# Altium PCB Kar_PCB.PcbDoc
Units mil, origin at the board's own origin, x right, y up, seen from the top; angles counter-clockwise.
Board outline 5655 x 3440 mil, 2 copper layers (Top Layer, Bottom Layer), stack 30.709 mil thick; 64 components, 44 nets, 297 pads, 317 vias.
Unrouted connection lines stored in the file: 2.
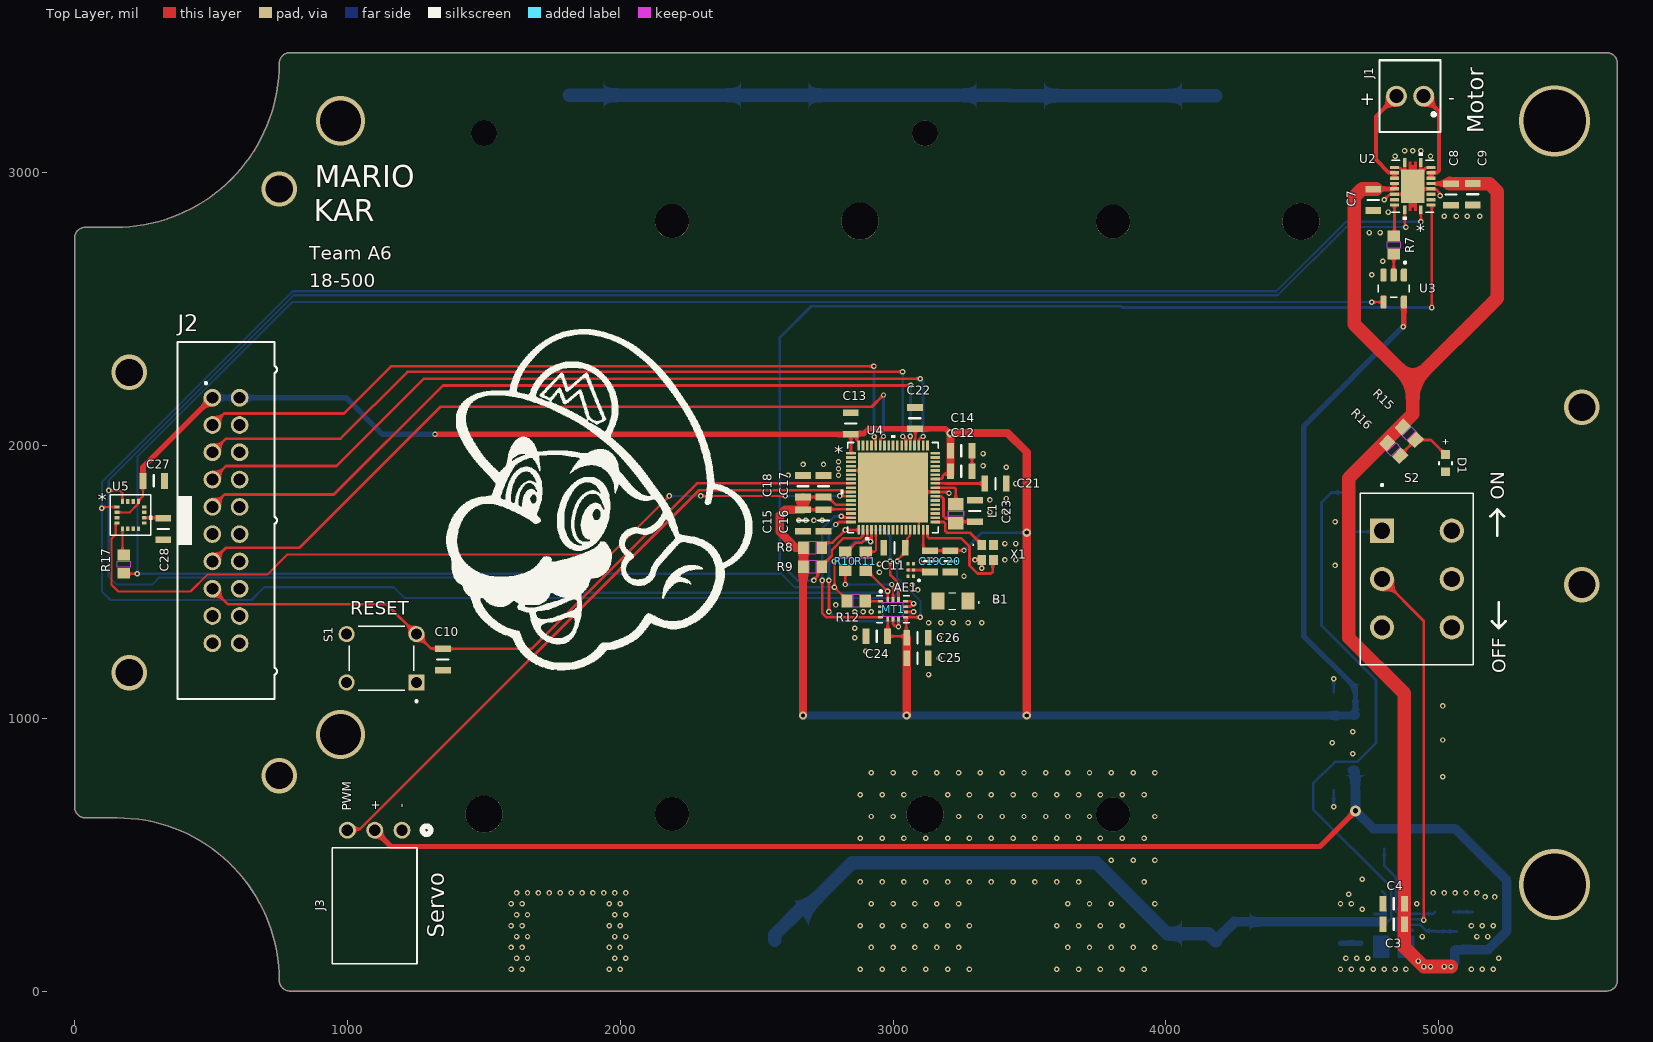
[diagram p0: Top Layer view]
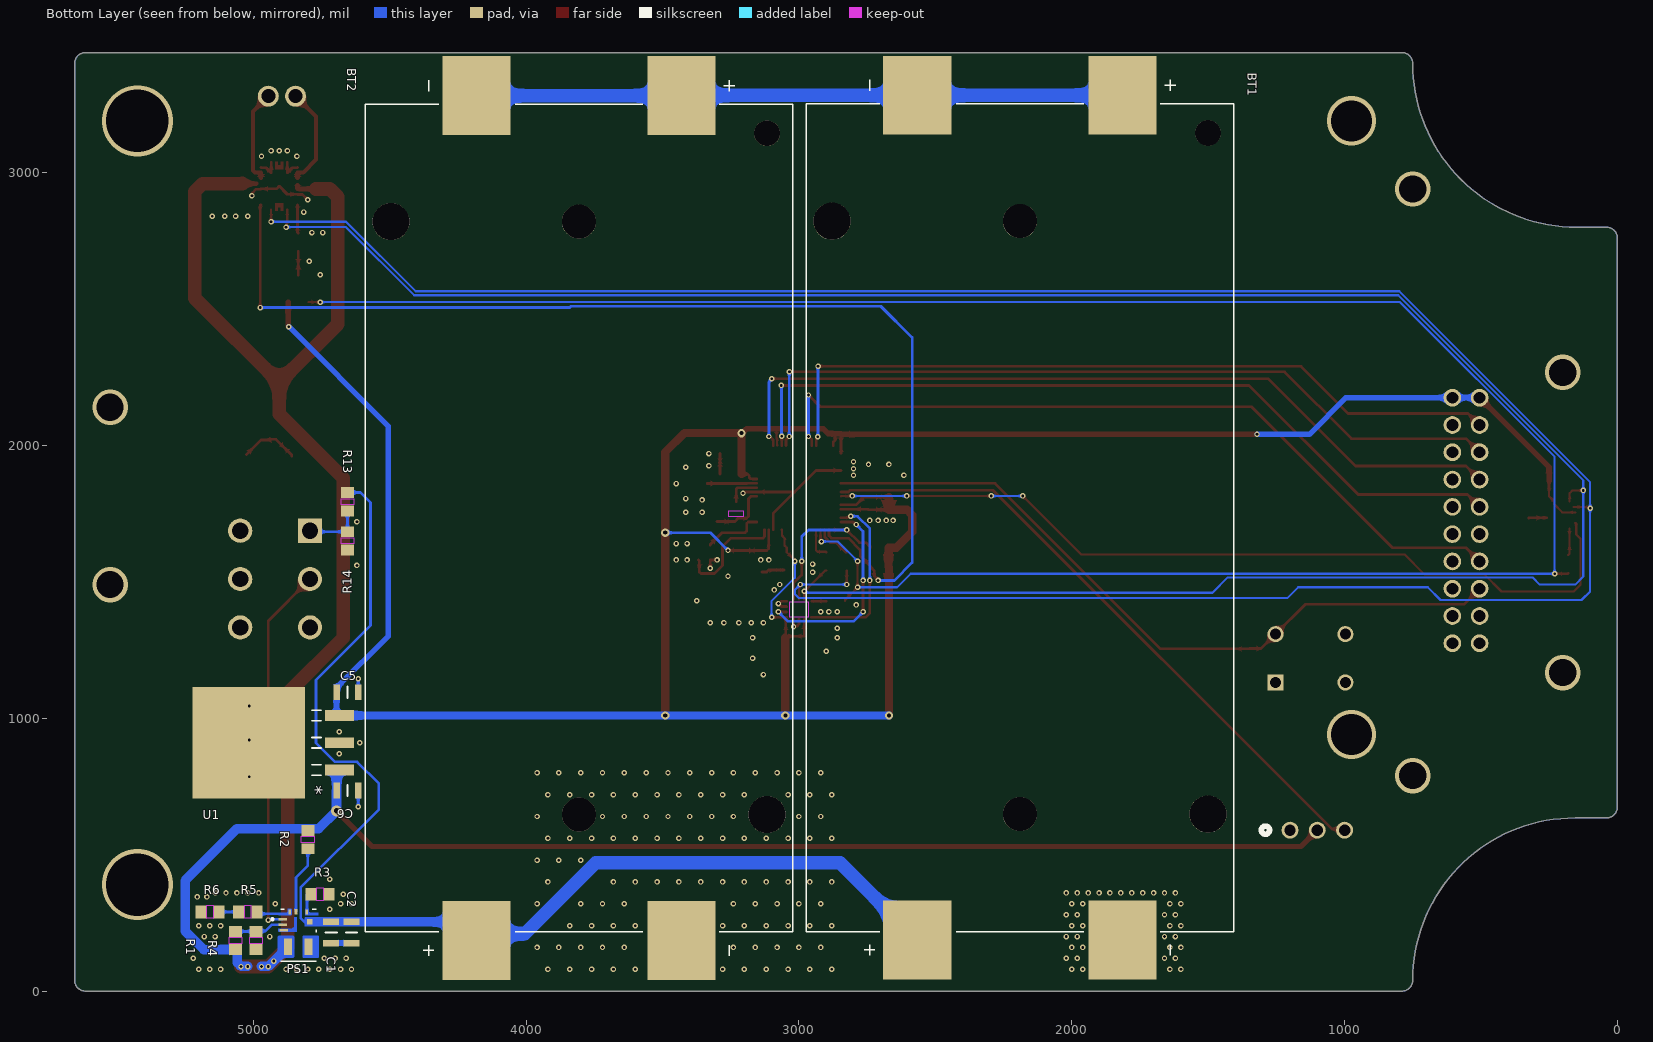
[diagram p1: Bottom Layer view, seen from below]
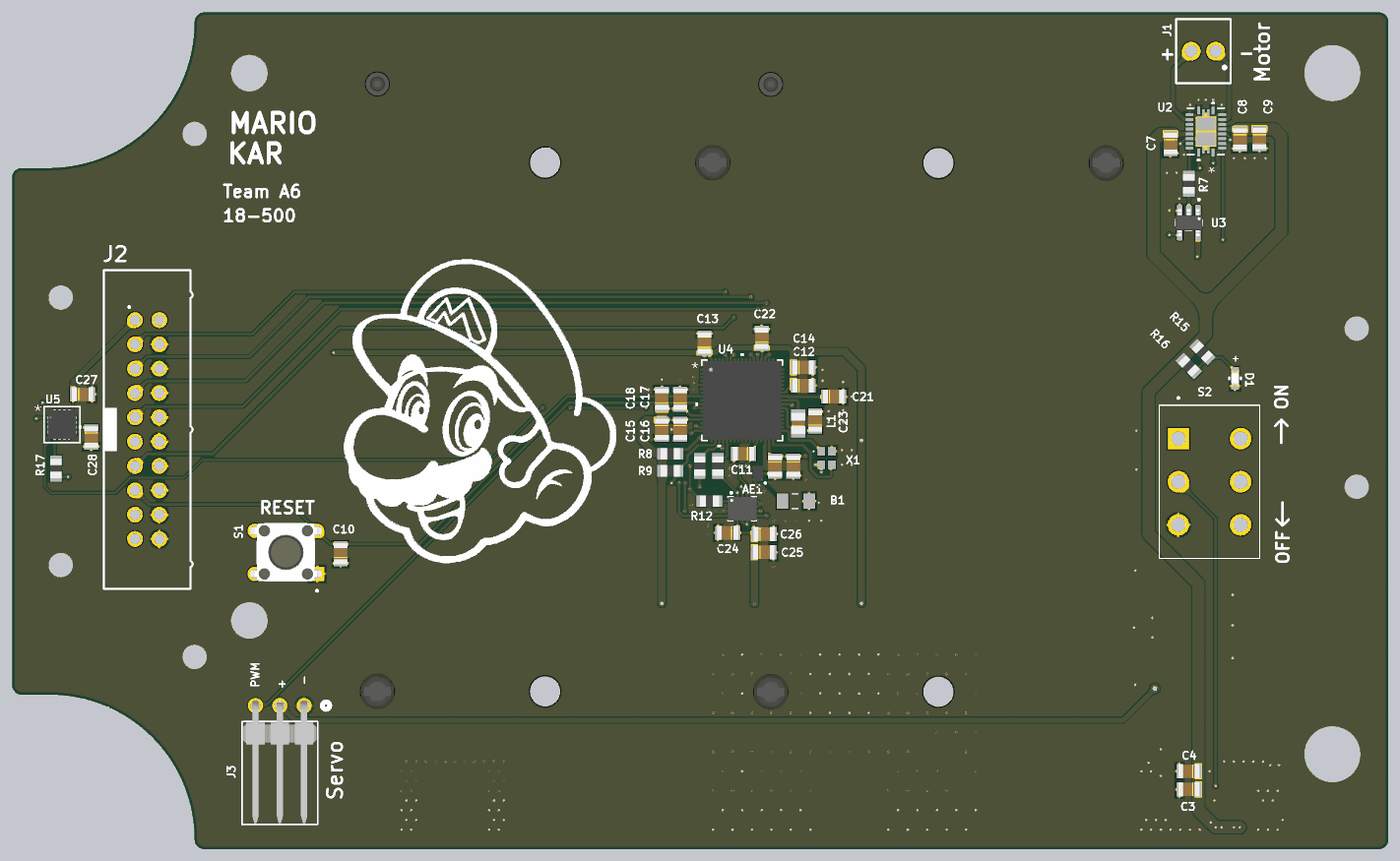
[diagram p2: 3D render of the assembled board from above, using the file's embedded part models]
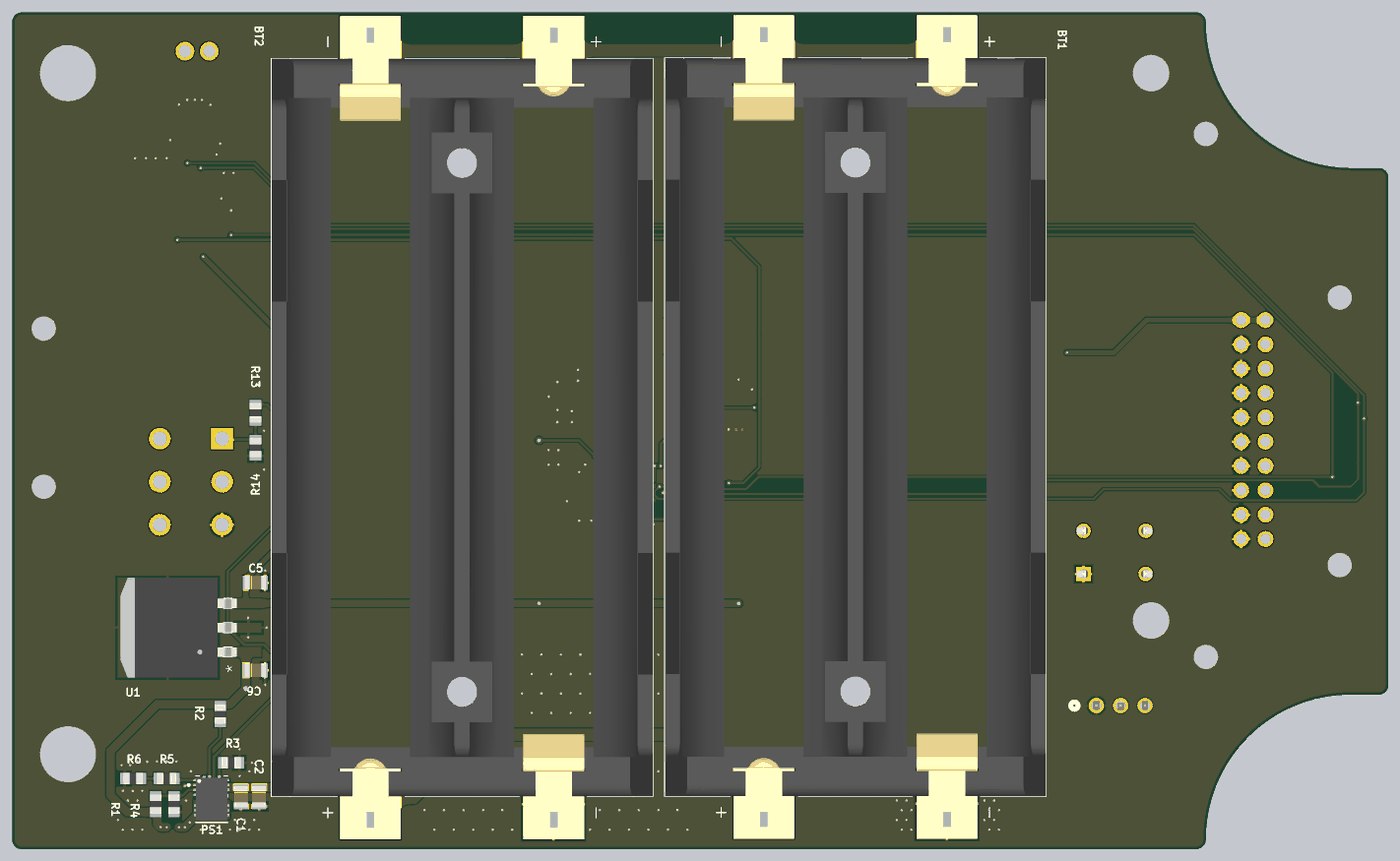
[diagram p3: 3D render of the assembled board from below, using the file's embedded part models]

## Layer stack, top to bottom
Top Solder: solder mask 0.3937, Solder Resist, Dk 3.5
Top Layer: signal copper 2.7559
Dielectric 1: dielectric 25.1969, FR-4, Dk 4.8
Bottom Layer: signal copper 2.7559
Bottom Solder: solder mask 0.3937, Solder Resist, Dk 3.5

## Board outline
40,635 cw(c40,675) 0,675 0,2760 cw(c40,2760) 40,2800 150,2800 ccw(c150,3400) 750,3400 cw(c790,3400) 790,3440 5615,3440 cw(c5615,3400) 5655,3400 5655,40 cw(c5615,40) 5615,0 790,0 cw(c790,40) 750,40 ccw(c155,40) 155,635

## Design rules (kind name [scope] priority, off if disabled: settings)
BoardOutlineClearance [All] p1: gap=10 ignorepadtopadclearanceinfootprint=FALSE
Clearance Clearance_KOL [IsKeepOut] p1: gap=2 ignorepadtopadclearanceinfootprint=FALSE
Clearance Clearance_KOL_1 [OnLayer('Keep-Out Layer')] p2: gap=2 ignorepadtopadclearanceinfootprint=FALSE
Clearance [All] p3: gap=5 ignorepadtopadclearanceinfootprint=FALSE
ComponentClearance ComponentClearance_ESP32 [All vs InComponent('U1')] p1: gap=0 collisioncheckmode=3 verticalgap=0 showdistances=FALSE
ComponentClearance [All] p2: gap=10 collisioncheckmode=3 verticalgap=10 showdistances=FALSE
HoleSize [All] p1: absolutevalues=TRUE maxlimit=236.22 minlimit=0.98 maxpercent=80.000 minpercent=20.000
MinimumSolderMaskSliver [All] p1: minsoldermaskwidth=5
PolygonConnect PolygonConnect_Stitch [isVia and InNet('GND')] p1: connectstyle=Direct reliefconductorwidth=10 reliefentries=4 polygonreliefangle="90 Angle" airgapwidth=10
PolygonConnect [All] p2: connectstyle=Relief reliefconductorwidth=10 reliefentries=4 polygonreliefangle="90 Angle" airgapwidth=10
RoutingVias [All] p1: holewidth=10 width=20 viastyle="Through Hole" minholewidth=10 minwidth=20 maxholewidth=230 maxwidth=260
SilkToSilkClearance [All] p1: silktosilkclearance=7
SolderMaskExpansion [All] p1: expansion=4 istentingtop=FALSE
SupplyNets "Schematic Supply Nets_1" [InNet('5V')] p1: voltage=0.000
Width Width_S50 [InNetClass('S50')] p1: maxlimit=42.51 minlimit=42.51 preferedwidth=42.51 impedanceprofiledriven=TRUE impedanceprofileid={861DD816-028D-45EC-A50D-6FCF3679BF68} impedanceprofilevalue=50.000000 minimp=50.000000 maximp=50.000000 favimp=50.000000
Width Width_S62 [InNetClass('S62')] p2: maxlimit=27.95 minlimit=27.95 preferedwidth=27.95 impedanceprofiledriven=TRUE impedanceprofileid={597D7582-E736-41B3-9602-78B84F21D497} impedanceprofilevalue=62.000000 minimp=50.000000 maximp=50.000000 favimp=50.000000
Width [All] p3: maxlimit=50 minlimit=8 preferedwidth=10
26 further rules are at their usual default settings.

## Classes and differential pairs
component class U_Magnetometer: C27 C28 R17 U5
net class S62: NetAE1_A3
net class S50: NetAE1_A1
component class U_STM32: AE1 B1 C10 C11 C12 C13 C14 C15 C16 C17 C18 C19 C20 C21 C22 C23 J2 J3 L1 R8 R9 R10 R11 S1 U4 X1
component class U_Power: C1 C2 C3 C4 C5 C6 D1 PS1 R1 R2 R3 R4 R5 R6 R13 R14 R15 R16 S2 U1
component class U_Motor: C7 C8 C9 R7 U3
component class U_Kar_IMU: C24 C25 C26 MT1 R12
component class Kar_PCB: BT1 BT2 J1

## Components (designator, comment, footprint, x,y, rotation, side; value= is the part's Value field where it differs from the comment)
AE1 "MLPF-WB55-01E3" MLPF-WB55-01E3_STM 3064.84,1543.43 r180 top
B1 "W3078" W3078 3220.12,1430.32 r180 top
BT1 "1048P" BAT_1048P 2190,1735.32 r90 bottom
BT2 "1048P" BAT_1048P 3806.18,1733.74 r90 bottom
C1 "C2012X5R1H106K125AC" CAPC2012X145N 4715,215.31 r90 bottom value=10u
C2 "KAM21BR71H104JM" CAPC2012X145N 4640,215.31 r90 bottom value=0.1u
C3 "C2012X5R1V226M125AC" CAPC2012X145N 4835,245.31 r0 top value=22u
C4 "C2012X5R1V226M125AC" CAPC2012X145N 4835,320.31 r0 top value=22u
C5 "C2012X5R1A336M125AC" CAPC2012X145N 4655,1095.32 r0 bottom value=33u
C6 "GCM21BR71H474KA55K" CAPC2012X145N 4655,735.32 r0 bottom value=0.47u
C7 "KAM21BR71H104JM" CAPC2012X145N 4760,2900.32 r90 top value=0.1u
C8 "KAM21BR71H104JM" CAPC2012X145N 5045,2920.32 r90 top value=0.1u
C9 "C2012X5R1H106K125AC" CAPC2012X145N 5125,2920.94 r90 top value=10u
C10 "KAM21BR71H104JM" CAPC2012X145N 1350,1215 r270 top value=0.1u
C11 "KAM21BR71H104JM" CAPC2012X145N 3005,1625.32 r0 top value=0.1u
C12 "KAM21BR71H104JM" CAPC2012X145N 3250,1905.32 r180 top value=0.1u
C13 "KAM21BR71H104JM" CAPC2012X145N 2845,2080.32 r270 top value=0.1u
C14 "C2012X5R1H475M125AB" CAPC2012X145N 3250,1980.32 r180 top value=4.7u
C15 "KAM21BR71H103KT" CAPC2012X145N 2670,1725.32 r90 top value=0.01u
C16 "KGM21AR51H105KU" CAPC2012X145N 2745,1725.32 r90 top value=1u
C17 "KAM21BR71H104JM" CAPC2012X145N 2745,1850.32 r270 top value=0.1u
C18 "KGM21AR51H105KU" CAPC2012X145N 2670,1850.32 r270 top value=1u
C19 "KAM21BR71H104JM" CAPC2012X145N 3135,1575.32 r90 top value=0.1u
C20 "KGM21AR51H105KU" CAPC2012X145N 3210,1575.32 r90 top value=1u
C21 "C2012X5R1H475M125AB" CAPC2012X145N 3375,1860.32 r180 top value=4.7u
C22 "KAM21BR71H104JM" CAPC2012X145N 3080,2100 r270 top value=0.1u
C23 "C2012X5R1H475M125AB" CAPC2012X145N 3300,1760.32 r270 top value=4.7u
C24 "KAM21BR71H104JM" CAPC2012X145N 2940,1300.32 r0 top value=0.1u
C25 "KAM21BR71H104JM" CAPC2012X145N 3089.37,1220.32 r180 top value=0.1u
C26 "C2012X7R1H225K125AE" CAPC2012X145N 3090,1295.32 r180 top value=2.2u
C27 "KGM21AR51H105KU" CAPC2012X145N 290,1870 r180 top value=1u
C28 "C2012X5R1H106K125AC" CAPC2012X145N 325,1694.33 r90 top value=10u
D1 "WL-SMCW_0603" WL-SMCW_0603 5025,1935.32 r90 top
J1 "691210910002" 691210910002 4895,3280.32 r180 top
J2 "6120XX21621_61202021621" 61202021621 555,1725 r270 top
J3 "22289033" CONN03_22289033_MOL 1200,590 r0 top
L1 "LQM21FN100M80L" IND_LQM21FN100M80L_MUR 3230,1750 r90 top value=10u
MT1 "ICM-42670-P" XDCR_ICM-42670-P 3000,1399.39 r0 top
PS1 "TPSM843321RCJR" MODULE_TPSM843321RCJR 4835,205.31 r180 bottom
R1 "RC0805FR-0773K2L" RC0805N_YAG 5065,185.31 r90 bottom value=73.2k
R2 "RC0805FR-0710KL" RC0805N_YAG 4800,555.32 r270 bottom value=10k
R3 "RC0805FR-0718KL" RC0805N_YAG 4755,355.31 r180 bottom value=18k
R4 "RC0805FR-0710KL" RC0805N_YAG 4990,185.31 r270 bottom value=10k
R5 "RC0805FR-0718KL" RC0805N_YAG 5020,290.31 r0 bottom value=18k
R6 "RC0805FR-0722KL" RC0805N_YAG 5158.5,290.31 r0 bottom value=22k
R7 "RC0805JR-07100RL" RC0805N_YAG 4835,2735 r90 top value=100
R8 "RC0805JR-074K7L" RC0805N_YAG 2705,1625.32 r0 top value=4.7k
R9 "RC0805JR-074K7L" RC0805N_YAG 2705,1555.32 r0 top value=4.7k
R10 "RC0805JR-07100RL" RC0805N_YAG 2825,1575.32 r270 top value=100
R11 "RC0805JR-07100RL" RC0805N_YAG 2900,1575.32 r270 top value=100
R12 "RC0805JR-07100RL" RC0805N_YAG 2865,1430.32 r0 top value=100
R13 "RC0805FR-0710KL" RC0805N_YAG 4655,1793.82 r270 bottom value=10k
R14 "RC0805FR-0710KL" RC0805N_YAG 4655,1650.32 r270 bottom value=10k
R15 "RC0805JR-07100RL" RC0805N_YAG 4891.31,2044 r315 top value=100
R16 "RC0805JR-07100RL" RC0805N_YAG 4835,1985.32 r315 top value=100
R17 "RC0805JR-07100RL" RC0805N_YAG 180,1565 r90 top value=100
S1 "TS02-66-70-BK-260-LCR-D" SW_TS02-66-70-BK-260-LCR-D 1125,1220 r180 top
S2 "SLW-1678105-6A-N-D" SW_SLW-1678105-6A-N-D 4920,1510.32 r270 top
U1 "LM3940ISX-3.3/NOPB" TS3B 5010,910.32 r90 bottom
U2 "DRV8242SQRHLRQ1" VQFN20_RHL_TEX 4905,2950.32 r180 top
U3 "SN74LV1T34DBVR" SOT95P280X145-5N 4835,2575.32 r270 top
U4 "STM32WB55RGV6TR" VFQFN68-8x8mm 3000,1845.32 r0 top
U5 "MMC5983MA" MMC5983MA_MEM 205,1745 r0 top
X1 "CX2016DB32000D0WZRC1" CX2016DB32000D0WZRC1 3346.65,1607.76 r270 top

## Footprints (in the part's own frame and the unit in brackets; to place one, negate y for a bottom-side part, rotate by r counter-clockwise, add the part's x,y. Pads: shape width x height; smd on the part's side, far side on the other; paste and mask are expansions set on the pad)
61202021621 [mm]
  round 1.65 hole 1.1: 1(-11.43,-1.27) 2(-11.43,1.27) 3(-8.89,-1.27) 4(-8.89,1.27) 5(-6.35,-1.27) 6(-6.35,1.27) 7(-3.81,-1.27) 8(-3.81,1.27) 9(-1.27,-1.27) 10(-1.27,1.27) 11(1.27,-1.27) 12(1.27,1.27) 13(3.81,-1.27) 14(3.81,1.27) 15(6.35,-1.27) 16(6.35,1.27) 17(8.89,-1.27) 18(8.89,1.27) 19(11.43,-1.27) 20(11.43,1.27)
  silkscreen extent -16.63,-4.52 16.63,4.74
691210910002 [mm]
  round 1.95 hole 1.3: 1(-1.27,0) 2(1.27,0)
  silkscreen extent -2.84,-3.35 2.84,3.35
BAT_1048P [mm]
  rect 7.34x6.35 smd: N1(39.33,9.555) N2(-39.33,-9.555) P1(-39.33,9.555) P2(39.33,-9.555)
  round 3.45 hole 3.45 unplated: ""(-27.6,-17.505) ""(27.6,17.505)
  round 3.17 hole 3.17 unplated: ""(-27.6,0) ""(27.6,0)
  round 2.39 hole 2.39 unplated: ""(35.82,-17.505)
  silkscreen extent -40.75,-19.89 40.75,19.89, body extent -43,-19.89 43,19.89, height 15.05
CAPC2012X145N [mm]
  rect 0.62x1.47 smd: 1(-1,0) 2(1,0)
  silkscreen extent 0,-0.53 0,0.53, body extent -1.1,-0.72 1.1,0.72, height 1.5
CONN03_22289033_MOL [mil]
  round 62 / inner round 60 / far side round 62 hole 42 paste-99999 mask+0: 1(0,0) 2(-100,0) 3(-200,0)
  silkscreen extent -255,-489 105,15, body extent -250,-484 50,20, height 98
CX2016DB32000D0WZRC1 [mm]
  rect 0.9x0.8 smd mask+0.076: 1(-0.7,-0.55) 2(0.7,-0.55) 3(0.7,0.55) 4(-0.7,0.55)
  silkscreen extent -0.75,-1.4 -0.65,-1.3
IND_LQM21FN100M80L_MUR [mil]
  rect 46x57 smd paste+0 mask+0: 1(-34.5,0) 2(34.5,0)
  Top Layer keep-out region: -9.5,-26.5 -9.5,26.5 9.5,26.5 9.5,-26.5
  Keep-Out Layer region: -9.5,-28.5 -9.5,28.5 9.5,28.5 9.5,-28.5
  body extent -44,-29 44,29, height 57
MLPF-WB55-01E3_STM [mm]
  rect 0.3x0.3 smd paste-0.05 mask-0.051: A1(-0.25,0.587) A2(-0.25,0) A3(-0.25,-0.587) B1(0.25,0.587) B2(0.25,0) B3(0.25,-0.587)
  silkscreen extent -0.87,0.87 -0.66,1.07, body extent -0.5,-0.8 0.5,0.8, height 0.46
MMC5983MA_MEM [mil]
  rect 18x12 smd paste+0 mask+0: 1(-50.2,29.53) 2(-50.2,9.84) 3(-50.2,-9.84) 4(-50.2,-29.53) 9(50.2,-29.53) 10(50.2,-9.84) 11(50.2,9.84) 12(50.2,29.53)
  rect 12x18 smd paste+0 mask+0: 5(-29.53,-50.2) 6(-9.84,-50.2) 7(9.84,-50.2) 8(29.53,-50.2) 13(29.53,50.2) 14(9.84,50.2) 15(-9.84,50.2) 16(-29.53,50.2)
  silkscreen extent -74,-74 79,74, body extent -61,-61 61,61, height 39
MODULE_TPSM843321RCJR [mm]
  rrect40% 0.8x0.25 smd mask+0: 1(-1.45,1.475) 2(-1.45,0.975)
  rect 0.8x0.25 smd mask+0: 3(-1.35,0.463)
  rect 0.75x1.5 smd paste-2 mask+0: 4(-0.95,-1.088) 5(0.95,-1.088)
  rect 0.5x0.5 smd paste-1 mask+0: 6(1.05,1.225)
  rect 0.25x0.5 smd paste-1 mask+0: 7(0.8,2.15) 9(-0.8,2.15)
  rrect33% 0.3x0.55 smd mask+0: 8(-0.225,2.175)
  Top Layer region: 199 vertices and 0 holes, not listed, extent -1.85,0.326 -0.125,1.65
  Top Layer region: 176 vertices and 0 holes, not listed, extent -1.85,1.85 -0.625,2.45
  Top Layer region: -0.49,-0.076 -0.484,-0.076 -0.479,-0.077 -0.474,-0.078 -0.469,-0.08 -0.464,-0.082 -0.459,-0.084 -0.455,-0.086 -0.45,-0.088 -0.446,-0.091 -0.441,-0.094 -0.437,-0.097 -0.433,-0.101 -0.429,-0.104 -0.426,-0.108 -0.422,-0.112 -0.419,-0.116 -0.416,-0.121 -0.413,-0.125 -0.411,-0.13 -0.409,-0.134 -0.407,-0.139 -0.405,-0.144 -0.403,-0.149 -0.402,-0.154 -0.401,-0.159 -0.401,-0.165 -0.4,-0.17 -0.4,-0.175 -0.4,-2 -0.4,-2.005 -0.401,-2.01 -0.401,-2.016 -0.402,-2.021 -0.403,-2.026 -0.405,-2.031 -0.407,-2.036 -0.409,-2.041 -0.411,-2.045 -0.413,-2.05 -0.416,-2.054 -0.419,-2.059 -0.422,-2.063 -0.426,-2.067 -0.429,-2.071 -0.433,-2.074 -0.437,-2.078 -0.441,-2.081 -0.446,-2.084 -0.45,-2.087 -0.455,-2.089 -0.459,-2.091 -0.464,-2.093 -0.469,-2.095 -0.474,-2.097 -0.479,-2.098 -0.484,-2.099 -0.49,-2.099 -0.495,-2.1 -1.805,-2.1 -1.81,-2.099 -1.816,-2.099 -1.821,-2.098 -1.826,-2.097 -1.831,-2.095 -1.836,-2.093 -1.841,-2.091 -1.845,-2.089 -1.85,-2.087 -1.854,-2.084 -1.859,-2.081 -1.863,-2.078 -1.867,-2.074 -1.871,-2.071 -1.874,-2.067 -1.878,-2.063 -1.881,-2.059 -1.884,-2.054 -1.887,-2.05 -1.889,-2.045 -1.891,-2.041 -1.893,-2.036 -1.895,-2.031 -1.897,-2.026 -1.898,-2.021 -1.899,-2.016 -1.899,-2.01 -1.9,-2.005 -1.9,-2 -1.9,-0.175 -1.9,-0.17 -1.899,-0.165 -1.899,-0.159 -1.898,-0.154 -1.897,-0.149 -1.895,-0.144 -1.893,-0.139 -1.891,-0.134 -1.889,-0.13 -1.887,-0.125 -1.884,-0.121 -1.881,-0.116 -1.878,-0.112 -1.874,-0.108 -1.871,-0.104 -1.867,-0.101 -1.863,-0.097 -1.859,-0.094 -1.854,-0.091 -1.85,-0.088 -1.845,-0.086 -1.841,-0.084 -1.836,-0.082 -1.831,-0.08 -1.826,-0.078 -1.821,-0.077 -1.816,-0.076 -1.81,-0.076 -1.805,-0.075 -0.495,-0.075
  Top Layer region: 176 vertices and 0 holes, not listed, extent 0.625,1.85 1.85,2.45
  Top Layer region: 1.81,1.649 1.816,1.649 1.821,1.648 1.826,1.647 1.831,1.645 1.836,1.643 1.841,1.641 1.845,1.639 1.85,1.637 1.854,1.634 1.859,1.631 1.863,1.628 1.867,1.624 1.871,1.621 1.874,1.617 1.878,1.613 1.881,1.609 1.884,1.604 1.887,1.6 1.889,1.595 1.891,1.591 1.893,1.586 1.895,1.581 1.897,1.576 1.898,1.571 1.899,1.566 1.899,1.56 1.9,1.555 1.9,1.55 1.9,0.9 1.9,0.895 1.899,0.89 1.899,0.884 1.898,0.879 1.897,0.874 1.895,0.869 1.893,0.864 1.891,0.859 1.889,0.855 1.887,0.85 1.884,0.846 1.881,0.841 1.878,0.837 1.874,0.833 1.871,0.829 1.867,0.826 1.863,0.822 1.859,0.819 1.854,0.816 1.85,0.813 1.845,0.811 1.841,0.809 1.836,0.807 1.831,0.805 1.826,0.803 1.821,0.802 1.816,0.801 1.81,0.801 1.805,0.8 0.695,0.8 0.69,0.801 0.684,0.801 0.679,0.802 0.674,0.803 0.669,0.805 0.664,0.807 0.659,0.809 0.655,0.811 0.65,0.813 0.646,0.816 0.641,0.819 0.637,0.822 0.633,0.826 0.629,0.829 0.626,0.833 0.622,0.837 0.619,0.841 0.616,0.846 0.613,0.85 0.611,0.855 0.609,0.859 0.607,0.864 0.605,0.869 0.603,0.874 0.602,0.879 0.601,0.884 0.601,0.89 0.6,0.895 0.6,0.9 0.6,1.55 0.6,1.555 0.601,1.56 0.601,1.566 0.602,1.571 0.603,1.576 0.605,1.581 0.607,1.586 0.609,1.591 0.611,1.595 0.613,1.6 0.616,1.604 0.619,1.609 0.622,1.613 0.626,1.617 0.629,1.621 0.633,1.624 0.637,1.628 0.641,1.631 0.646,1.634 0.65,1.637 0.655,1.639 0.659,1.641 0.664,1.643 0.669,1.645 0.674,1.647 0.679,1.648 0.684,1.649 0.69,1.649 0.695,1.65 1.805,1.65
  Top Layer region: 1.81,-0.076 1.816,-0.076 1.821,-0.077 1.826,-0.078 1.831,-0.08 1.836,-0.082 1.841,-0.084 1.845,-0.086 1.85,-0.088 1.854,-0.091 1.859,-0.094 1.863,-0.097 1.867,-0.101 1.871,-0.104 1.874,-0.108 1.878,-0.112 1.881,-0.116 1.884,-0.121 1.887,-0.125 1.889,-0.13 1.891,-0.134 1.893,-0.139 1.895,-0.144 1.897,-0.149 1.898,-0.154 1.899,-0.159 1.899,-0.165 1.9,-0.17 1.9,-0.175 1.9,-2 1.9,-2.005 1.899,-2.01 1.899,-2.016 1.898,-2.021 1.897,-2.026 1.895,-2.031 1.893,-2.036 1.891,-2.041 1.889,-2.045 1.887,-2.05 1.884,-2.054 1.881,-2.059 1.878,-2.063 1.874,-2.067 1.871,-2.071 1.867,-2.074 1.863,-2.078 1.859,-2.081 1.854,-2.084 1.85,-2.087 1.845,-2.089 1.841,-2.091 1.836,-2.093 1.831,-2.095 1.826,-2.097 1.821,-2.098 1.816,-2.099 1.81,-2.099 1.805,-2.1 0.495,-2.1 0.49,-2.099 0.484,-2.099 0.479,-2.098 0.474,-2.097 0.469,-2.095 0.464,-2.093 0.459,-2.091 0.455,-2.089 0.45,-2.087 0.446,-2.084 0.441,-2.081 0.437,-2.078 0.433,-2.074 0.429,-2.071 0.426,-2.067 0.422,-2.063 0.419,-2.059 0.416,-2.054 0.413,-2.05 0.411,-2.045 0.409,-2.041 0.407,-2.036 0.405,-2.031 0.403,-2.026 0.402,-2.021 0.401,-2.016 0.401,-2.01 0.4,-2.005 0.4,-2 0.4,-0.175 0.4,-0.17 0.401,-0.165 0.401,-0.159 0.402,-0.154 0.403,-0.149 0.405,-0.144 0.407,-0.139 0.409,-0.134 0.411,-0.13 0.413,-0.125 0.416,-0.121 0.419,-0.116 0.422,-0.112 0.426,-0.108 0.429,-0.104 0.433,-0.101 0.437,-0.097 0.441,-0.094 0.446,-0.091 0.45,-0.088 0.455,-0.086 0.459,-0.084 0.464,-0.082 0.469,-0.08 0.474,-0.078 0.479,-0.077 0.484,-0.076 0.49,-0.076 0.495,-0.075 1.805,-0.075
  silkscreen extent -2.5,-2.42 1.65,2.42, body extent -1.65,-2.25 1.65,2.25, height 2.05
RC0805N_YAG [mil]
  rect 40x47 smd paste+0 mask+0: 1(-33.5,0) 2(33.5,0)
  Top Layer keep-out region: -11.5,-23.5 -11.5,23.5 11.5,23.5 11.5,-23.5
  body extent -39,-24 39,24, height 28
SOT95P280X145-5N [mm]
  rrect50% 1.21x0.59 smd: 1(-1.255,0.95) 2(-1.255,0) 3(-1.255,-0.95) 4(1.255,-0.95) 5(1.255,0.95)
  silkscreen extent -2.51,-1.45 0.8,1.45, body extent -1.4,-1.45 1.4,1.45, height 1.45
SW_SLW-1678105-6A-N-D [mm]
  rect 2.25x2.25 / inner round 2.25 / far side rect 2.25x2.25 hole 1.5: 1(-4.5,-3.25)
  round 2.25 hole 1.5: 2(0,-3.25) 3(4.5,-3.25) 4(-4.5,3.25) 5(0,3.25) 6(4.5,3.25)
  silkscreen extent -8.85,-5.25 8,5.25
SW_TS02-66-70-BK-260-LCR-D [mm]
  rect 1.508x1.508 / inner round 1.508 / far side rect 1.508x1.508 hole 1: 1(-3.25,2.25)
  round 1.508 hole 1: 2(3.25,2.25) 3(-3.25,-2.25) 4(3.25,-2.25)
  silkscreen extent -3.35,-3 3,4.1, body extent -3.95,-3 3.95,3, height 7
TS3B [mil]
  rect 40x106 smd paste-53 mask-53: 1(-100,-326) 2(0,-326) 3(100,-326)
  rect 410x412 smd paste-206 mask-206: 4(0,6)
  silkscreen extent -119,-259 119,-224, body extent -205,-278 205,200, height 189
VFQFN68-8x8mm [mil]
  rect 36x10 smd paste-18 mask-18: 1(-154.5,125.98) 2(-154.5,110.24) 3(-154.5,94.49) 4(-154.5,78.74) 5(-154.5,62.99) 6(-154.5,47.24) 7(-154.5,31.5) 8(-154.5,15.75) 9(-154.5,0) 10(-154.5,-15.75) 11(-154.5,-31.5) 12(-154.5,-47.24) 13(-154.5,-62.99) 14(-154.5,-78.74) 15(-154.5,-94.49) 16(-154.5,-110.24) 17(-154.5,-125.98) 35(154.5,-125.98) 36(154.5,-110.24) 37(154.5,-94.49) 38(154.5,-78.74) 39(154.5,-62.99) 40(154.5,-47.24) 41(154.5,-31.5) 42(154.5,-15.75) 43(154.5,0) 44(154.5,15.75) 45(154.5,31.5) 46(154.5,47.24) 47(154.5,62.99) 48(154.5,78.74) 49(154.5,94.49) 50(154.5,110.24) 51(154.5,125.98)
  rect 10x36 smd paste-18 mask-18: 18(-125.98,-154.5) 19(-110.24,-154.5) 20(-94.49,-154.5) 21(-78.74,-154.5) 22(-62.99,-154.5) 23(-47.24,-154.5) 24(-31.5,-154.5) 25(-15.75,-154.5) 26(0,-154.5) 27(15.75,-154.5) 28(31.5,-154.5) 29(47.24,-154.5) 30(62.99,-154.5) 31(78.74,-154.5) 32(94.49,-154.5) 33(110.24,-154.5) 34(125.98,-154.5) 52(125.98,154.5) 53(110.24,154.5) 54(94.49,154.5) 55(78.74,154.5) 56(62.99,154.5) 57(47.24,154.5) 58(31.5,154.5) 59(15.75,154.5) 60(0,154.5) 61(-15.75,154.5) 62(-31.5,154.5) 63(-47.24,154.5) 64(-62.99,154.5) 65(-78.74,154.5) 66(-94.49,154.5) 67(-110.24,154.5) 68(-125.98,154.5)
  rect 256x256 smd paste-128 mask+0: 69(0,0)
  silkscreen extent -192,-192 166,192, body extent -161,-161 161,161, height 39
VQFN20_RHL_TEX [mil]
  rect 12x32 smd paste+0 mask+0: 1(-29.53,86.5) 10(-29.53,-86.5) 11(29.53,-86.5) 20(29.53,86.5)
  rect 32x12 smd paste+0 mask+0: 2(-67,68.9) 3(-67,49.21) 4(-67,29.53) 5(-67,9.84) 6(-67,-9.84) 7(-67,-29.53) 8(-67,-49.21) 9(-67,-68.9) 12(67,-68.9) 13(67,-49.21) 14(67,-29.53) 15(67,-9.84) 16(67,9.84) 17(67,29.53) 18(67,49.21) 19(67,68.9)
  rect 85x124 smd paste-61.5 mask+0: 21(0,0)
  Top Layer region: -15,62 15,62 15,90.5 5,90.5 5,77.5 -5,77.5 -5,90.5 -15,90.5
  Top Layer region: -15,-62 15,-62 15,-90.5 5,-90.5 5,-77.5 -5,-77.5 -5,-90.5 -15,-90.5
  silkscreen extent -76,-122 76,122
W3078 [mm]
  rect 1.2x1.6 smd: 1(-1.4,0) 2(1.4,0)
  silkscreen extent -2.45,-0.78 0.38,0.78
WL-SMCW_0603 [mm]
  rect 0.8x0.8 smd: 1(-0.8,0) 2(0.8,0)
  silkscreen extent -0.1,-0.61 0.1,0.61, body extent -0.8,-0.4 0.8,0.4, height 0.7
XDCR_ICM-42670-P [mm]
  rect 0.475x0.25 smd paste-1 mask+0.051: 1(-1.162,0.75) 2(-1.162,0.25) 3(-1.162,-0.25) 4(-1.162,-0.75) 8(1.162,-0.75) 9(1.162,-0.25) 10(1.162,0.25) 11(1.162,0.75)
  rect 0.25x0.475 smd paste-1 mask+0.051: 5(-0.5,-0.913) 6(0,-0.913) 7(0.5,-0.913) 12(0.5,0.913) 13(0,0.913) 14(-0.5,0.913)
  Keep-Out Layer region: 0.925,-0.675 -0.925,-0.675 -0.925,0.675 0.925,0.675
  silkscreen extent -1.5,-1.25 1.5,1.77, body extent -1.5,-1.25 1.5,1.25, height 0.81

## Part data
AE1: "2.4 GHz Matched filter companion chip for STM32WB55Cx and STM32WB55Rx", Manufacturer_Name=STMicroelectronics, Copyright="Copyright (C) 2025 Ultra Librarian. All rights reserved.", Datasheet=https://www.st.com/resource/en/datasheet/mlpf-wb55-01e3.pdf, Manufacturer_Part_Number=MLPF-WB55-01E3, RefDes=RefDes, Type=Type
B1: "Antennas CERAMIC W3078 GC380H N", Manufacturer_Name=PULSE, Mouser Part Number=673-W3078, Datasheet Link=https://datasheet.datasheetarchive.com/originals/distributors/DKDS-10/182581.pdf, Geometry.Height=1.2mm, Manufacturer_Part_Number=W3078, Mouser Price/Stock=https://www.mouser.co.uk/ProductDetail/Pulse-Electronics/W3078?qs=k0bvAmZt86CkgrK3%2FGxl6Q%3D%3D
BT1 BT2: "SMT Polarized Holder for Dual 18650 Batteries", Package=None, Availability="In Stock", Check_prices=https://www.snapeda.com/parts/1048P/Keystone+Electronics/view-part/?ref=eda, MF="Keystone Electronics", MP=1048P, Price=None, Purchase-URL=https://pricing.snapeda.com/search/part/1048P/?ref=eda, SnapEDA_Link=https://www.snapeda.com/parts/1048P/Keystone+Electronics/view-part/?ref=snap
C1 C9 C28: "Multilayer Ceramic Chip Capacitors, Capacitance=10?F, LxWxT:2x1.25x1.25mm", Manufacturer_Name=TDK, Mouser Part Number=810-C2012X5R1H106K12, Rated Voltage=50V, Datasheet Link=https://product.tdk.com/info/en/catalog/datasheets/mlcc_commercial_midvoltage_en.pdf, Geometry.Height=1.45mm, Manufacturer_Part_Number=C2012X5R1H106K125AC, Mouser Price/Stock=https://www.mouser.co.uk/ProductDetail/TDK/C2012X5R1H106K125AC?qs=rSMjJ%252B1ewcQGpfDVduhUmg%3D%3D
C2 C7 C8 C10 C11 C12 C13 C17 C19 C22 C24 C25: "Multilayer Ceramic Chip Capacitors, Capacitance=0.1u", Rated Voltage=50V, Manufacturer_Part_Number=KAM21BR71H104JM
C3 C4: "Multilayer Ceramic Chip Capacitors, Capacitance=22u", Rated Voltage=35V, Manufacturer_Part_Number=C2012X5R1V226M125AC
C5: "Multilayer Ceramic Chip Capacitors, Capacitance=33u", Rated Voltage=10V, Manufacturer_Part_Number=C2012X5R1A336M125AC
C6: "Multilayer Ceramic Chip Capacitors, Capacitance=0.47u", Rated Voltage=50V, Manufacturer_Part_Number=GCM21BR71H474KA55K
C14 C21 C23: "Multilayer Ceramic Chip Capacitors, Capacitance=4.7u", Manufacturer_Part_Number=GCM21BR71H474KA55K, Rated Voltage=50V
C15: "Multilayer Ceramic Chip Capacitors, Capacitance=0.01u", Rated Voltage=50V, Manufacturer_Part_Number=KAM21BR71H103KT
C16 C18 C20 C27: "Multilayer Ceramic Chip Capacitors, Capacitance=1u", Rated Voltage=50V, Manufacturer_Part_Number=KGM21AR51H105KU
C26: "Multilayer Ceramic Chip Capacitors, Capacitance=2.2u", Rated Voltage=50V, Manufacturer_Part_Number=C2012X7R1H225K125AE
D1: "0603, Green Typ.(@20mA): 520nm, 430mcd, 3.2V, 140Â° InGaN", Package="0603 WÃ¼rth Elektronik", Check_prices=https://www.snapeda.com/parts/150060GS75000/Wurth+Electronics/view-part/?ref=eda, MF="Wurth Electronics", MP=150060GS75000, SnapEDA_Link=https://www.snapeda.com/parts/150060GS75000/Wurth+Electronics/view-part/?ref=snap
J1 J2 MT1: Package=None, Availability=Unavailable, Price=None
  J1: MF="{'manufacturer': u'W\xfcrth Elektronik'}", MP=691210910002
  J2: MF="{'manufacturer': u'W\xfcrth Elektronik'}", MP=61202021621
  MT1: MP=ICM-42670-P
J3: "KK 254 Breakaway Header, Right-Angle Surface Mount Compatible, 3 Circuits, 0.38Âµm Gold (Au) Selective Plating, Mating Pin Length 8.23mm, with Kinked PC Tails", Manufacturer_Name="Molex Connector Corporation", Copyright="Copyright (C) 2025 Ultra Librarian. All rights reserved.", Datasheet=https://www.molex.com/en-us/products/part-detail-pdf/22289033?display=pdf, Manufacturer_Part_Number=22289033, RefDes=RefDes, Type=Type
L1: "No Description Available", Manufacturer_Name=Murata, Copyright="Copyright (C) 2025 Ultra Librarian. All rights reserved.", Manufacturer_Part_Number=LQM21FN100M80L
PS1: "Non-Isolated PoL Module DC DC Converter 1 Output 5V 3A 3.8V - 18V Input", Package=None, Check_prices=https://www.snapeda.com/parts/TPSM843321RCJR/Texas+Instruments/view-part/?ref=eda, MF="Texas Instruments", MP=TPSM843321RCJR, SnapEDA_Link=https://www.snapeda.com/parts/TPSM843321RCJR/Texas+Instruments/view-part/?ref=snap
R1: "RES 0805 73.2k 1% 1/8W", Manufacturer_Name=Yageo, Tolerance=1%, Manufacturer_Part_Number=RC0805FR-0773K2L
R2 R4 R13 R14: "RES 0805 10k 1% 1/8W", Manufacturer_Name=Yageo, Tolerance=1%, Manufacturer_Part_Number=RC0805FR-0710KL
R3 R5: "RES 0805 18k 1% 1/8W", Manufacturer_Name=Yageo, Tolerance=1%, Manufacturer_Part_Number=RC0805FR-0718KL
R6: "RES 0805 22k 1% 1/8W", Manufacturer_Name=Yageo, Tolerance=1%, Manufacturer_Part_Number=RC0805FR-0722KL
R7 R10 R11 R12 R15 R16 R17: "RES 0805 100 5% 1/8W", Manufacturer_Name=Yageo, Tolerance=5%, Manufacturer_Part_Number=RC0805JR-07100RL
R8 R9: "RES 0805 4.7k 5% 1/8W", Manufacturer_Name=Yageo, Tolerance=5%, Manufacturer_Part_Number=RC0805JR-074K7L
S1: "6 x 6 mm, 7 mm Actuator Height, 260 gf, Black, Long Crimped, Through Hole, SPST, Tactile Switch", Package=None, Check_prices=https://www.snapeda.com/parts/TS02-66-70-BK-260-LCR-D/Same+Sky/view-part/?ref=eda, MF="Same Sky", MP=TS02-66-70-BK-260-LCR-D, SnapEDA_Link=https://www.snapeda.com/parts/TS02-66-70-BK-260-LCR-D/Same+Sky/view-part/?ref=snap
S2: "16 x 7.8 x 10.5 mm, 6 mm Raised Slide Actuator, Through Hole, Slide Switch", Package=Package, Check_prices=https://www.snapeda.com/parts/SLW-1678105-6A-N-D/Same+Sky/view-part/?ref=eda, MF="Same Sky", MP=SLW-1678105-6A-N-D, SnapEDA_Link=https://www.snapeda.com/parts/SLW-1678105-6A-N-D/Same+Sky/view-part/?ref=snap
U1: library part LM3940ISX-3.3NOPB, "1-A, low-dropout voltage regulator for 5-V to 3.3-V conversion 3-DDPAK/TO-263 -40 to 125", Manufacturer_Name="Texas Instruments", Copyright="Copyright (C) 2025 Ultra Librarian. All rights reserved.", Datasheet=https://www.ti.com/lit/gpn/lm3940, Manufacturer_Part_Number=LM3940ISX-3.3/NOPB, RefDes=RefDes, Type=LM3940IS-3.3
U2: "Automotive, 40-V 6-A H-bridge driver with integrated current sensing and feedback 20-VQFN -40 to 125", Manufacturer_Name="Texas Instruments", Copyright="Copyright (C) 2025 Ultra Librarian. All rights reserved.", Datasheet=https://www.ti.com/lit/gpn/drv8242-q1, Manufacturer_Part_Number=DRV8242SQRHLRQ1, RefDes=RefDes, Type="Power Management"
U3: "Single Power Supply BUFFER Logic Level Shifter (no enable)", Package="SOT-23-5 Texas Instruments", Check_prices=https://www.snapeda.com/parts/SN74LV1T34DBVR/Texas+Instruments/view-part/?ref=eda, MF="Texas Instruments", MP=SN74LV1T34DBVR, SnapEDA_Link=https://www.snapeda.com/parts/SN74LV1T34DBVR/Texas+Instruments/view-part/?ref=snap
U4: "Ultra-low-power dual core Arm Cortex-M4 MCU 64 MHz, Cortex-M0+ 32 MHz with 1 Mbyte of Flash memory, Bluetooth LE 5.4, 802.15.4, Zigbee, Thread, Matter, USB, LCD, AES-256", Manufacturer_Name=STMicroelectronics, Copyright="Copyright (C) 2025 Ultra Librarian. All rights reserved.", Datasheet=https://www.st.com/resource/en/datasheet/stm32wb55cc.pdf, Manufacturer_Part_Number=STM32WB55RGV6TR, RefDes=RefDes, Type=Type
U5: "No Description Available", Manufacturer_Name=Memsic, Copyright="Copyright (C) 2025 Ultra Librarian. All rights reserved.", Manufacturer_Part_Number=MMC5983MA, RefDes=RefDes, Type=Type
X1: "32 MHz +/-25ppm Crystal 8pF 60 Ohms 4-SMD, No Lead", Manufacturer_Name="Kyocera AVX", Mouser Part Number=581-CX2016DB32DWZRC1, Datasheet Link=https://ele.kyocera.com/assets/products/crystal-device/cx2016db_e.pdf, Geometry.Height=0.45mm, Manufacturer_Part_Number=CX2016DB32000D0WZRC1, Mouser Price/Stock=https://www.mouser.co.uk/ProductDetail/KYOCERA-AVX/CX2016DB32000D0WZRC1?qs=mHG8nxlouK5LiZGb%2FcBxwg%3D%3D

## Via types
v1: diameter 20, hole 10, Top Layer to Bottom Layer, tented both sides, 301 vias
v2: diameter 130, hole 100, Top Layer to Bottom Layer, 6 vias
v3: diameter 30, hole 15, Top Layer to Bottom Layer, tented both sides, 5 vias
v4: diameter 180, hole 150, Top Layer to Bottom Layer, 2 vias
v5: diameter 260, hole 230, Top Layer to Bottom Layer, 2 vias
v6: diameter 40, hole 20, Top Layer to Bottom Layer, tented both sides, 1 vias

## Nets (pads, with @x,y where several pads share a name; then routed paths per layer and width w, separated by ;. In a path a pad name is that pad's centre, name@x,y a point inside that pad or via, vN(x,y) a via of type N, cw(c..) or ccw(c..) an arc to the next point about the centre after c; other vN are vias at no path point)
3V3: C5.2 C11.2 C12.2 C13.2 C14.2 C15.2 C16.2 C17.2 C18.2 C19.2 C20.2 C22.2 C24.2 C25.2 C26.2 C27.2 J2.1 J2.2 MT1.5 MT1.8 R8.1 R9.1 U1.3 U3.5 U4.1 U4.13 U4.14 U4.30 U4.33 U4.45 U4.55 U4.68 U5.2 U5.13 | length 11522.2
  Top Layer w8: U5.2 202.22,1754.84 232.53,1785.15 232.53,1793.2 U5.13 ; U5.13@234.53,1798.2 250.63,1814.3 C27.2 ; v1(3015,1575.32) 3017.3,1577.61 3017.3,1581.51 3044.37,1608.58 C11.2 3052.57,1633.52 3052.57,1660.42 3061.84,1669.69 3061.84,1672.52 3061.99,1672.67 3061.99,1689.82 U4.30 ; U4.55 3080.49,2001.56 3080.49,2024.16 3081.24,2024.91 3081.24,2027.76 3081.88,2028.4 3081.88,2058.75 C22.2
  Top Layer w10: C15.2 C16.2 2746.89,1766.57 U4.14 ; C18.2 C17.2 2761.73,1810.94 2790.35,1782.32 U4.13 ; C13.2 2845.5,2040.44 U4.1 ; C13.2@2861.73,2040.94 2866.8,2035.88 2866.8,2020.39 2874.02,2013.17 U4.68 ; MT1.5 2980.24,1363.39 2980.24,1301.18 C24.2 3045.63,1300.32 C26.2@3048.2,1297.75 ; MT1.8 MT1.8 3099.63,1369.94 v1(3100,1370.32) ; MT1.8@3048.12,1369.86 3048.2,1369.78 C26.2@3048.2,1297.75 ; C26.2 C26.2@3048.2,1297.75 ; U4.33 3110.24,1622.72 3118.27,1614.69 C19.2 C20.2 3210.32,1615 3259.69,1615 v1(3260,1615.32) ; U4.45 3170.43,1876.81 3171.18,1877.56 3176.64,1877.56 3182.5,1883.42 3182.5,1889.46 3188.36,1895.32 C12.2@3210.63,1895.32
  Top Layer w15: C14.2@3210.63,1970.32 C14.2@3210.63,1987.05
  Top Layer w20: C27.2 250.63,1920.63 J2.1 ; v1(1320.94,2040.94) 1380,2040.94 C13.2 2847.2,2043.15 2893.15,2043.15 2910.63,2060.63 C22.2 3191.66,2060.63 3207.29,2045 v3(3210,2045) ; v1(4870,2435.32) 4872.4,2437.72 U3.5
  Top Layer w30: v3(2670,1010.32) 2670,1553.82 R9.1 R8.1 2642.57,1625.32 2585,1682.89 2585,1745.32 2604.37,1764.69 C15.2 C18.2 ; v3(3050,1010.32) C25.2 3050,1294.69 C26.2 ; C12.2@3210.63,1895.32 3210,1895.94 3210,1970.32 3210,1987.05 v3(3210,2045) 3210.32,2045.32 3420,2045.32 3490,1975.32 v3(3490,1680.32) v3(3490,1010.32)
  Bottom Layer w8: v1(3015,1575.32) 3015,1515.32 3100,1430.32 v1(3100,1370.32)
  Bottom Layer w10: v1(3260,1615.32) 3325,1680.32 v3(3490,1680.32)
  Bottom Layer w20: J2.1 J2.2 995,2175 1129.06,2040.94 v1(1320.94,2040.94) ; U1.3 4685,1010.32 4695,1020.32 4695,1094.69 C5.2 4694.37,1112.05 4505,1301.42 4505,2070.32 v1(4870,2435.32)
  Bottom Layer w30: v3(2670,1010.32) v3(3050,1010.32) v3(3490,1010.32) U1.3
  Bottom Layer w35: U1.3@4685,1010.32 4691.87,1010.32 U1.3@4694.37,1012.82
5V: C3.2 C4.2 C6.2 C7.2 C8.2 C9.2 J3.2 PS1.4 R1.1 R2.1 R15.1 R16.1 U1.1 U2.6 U2.15 U2.16 | length 9594.1
  Top Layer w15: C7.2@4760.39,2940.08 4837.61,2940.08 U2.16 U2.15@4838,2954.79 ; U2.6@4987.87,2959.69 C8.2
  Top Layer w20: J3.2 1160,530 4564.69,530 v6(4695,660.32)
  Top Layer w50: C7.2@4770,2940.08 4719.29,2940.08 4690,2910.79 4690,2445.32 4905,2230.32 ; C8.2@5040.05,2960.04 5040.4,2959.69 5185.63,2959.69 5215,2930.32 5215,2540.32 4905,2230.32 ; v1(5045,90) v1(4945,90) v1(4925,110) 4874.37,160.63 C3.2 C4.2 4874.37,1090.94 4670,1295.32 4670,1880.32 4905,2115.32 4905,2230.32
  Bottom Layer w35: U1.1 4691.87,810.32 4694.37,807.82 C6.2 4695,734.69 v6(4695,660.32) 4760,595.32 5060,595.32 5250,405.31 5250,220.31 5181.5,151.81 R1.1 5061.5,151.81 5059,149.31 5059,104.82 5044.5,90.31 v1@5020,90.31 ; PS1.4 4944.59,90.31 v1@4970,90.31
  other v1: 4970,90 5020,90
C\S\_IMU: MT1.12 R8.2 U4.18 | length 582.6
  Top Layer w10: R8.2 2738.5,1628.82 2753.5,1643.82 2778.5,1643.82 v1(2825,1690.32) 2874.02,1690.32 U4.18 ; v1(2990,1575.32) 2990,1525.32 3019.68,1495.63 MT1.12
  Bottom Layer w10: v1(2825,1690.32) 2965,1690.32 2990,1665.32 v1(2990,1575.32)
C\S\_Mag: U4.11 U5.4 | length 3101.4
  Top Layer w8: U5.4 152.63,1715.47 150.63,1713.47 150.63,1673.6 135,1657.98 135,1490 160,1465 425,1465 487.5,1527.5 707.5,1527.5 780,1600 1965,1600 v1(2180,1815) ; v1(2295.15,1814.85) 2295.23,1814.92 2604.92,1814.92 v1(2605,1815) ; v1(2805,1815) 2805.59,1814.41 2844.91,1814.41 U4.11
  Bottom Layer w8: v1(2180,1815) 2180.08,1814.92 2295.08,1814.92 v1(2295.15,1814.85) ; v1(2605,1815) v1(2805,1815)
C\S\_Motor: R9.2 U2.2 U4.19 | length 4091.3
  Top Layer w10: v1(2710,1505.32) 2710,1508.02 2723.5,1521.52 2723.5,1540.32 R9.2 2738.5,1558.82 2775.43,1595.74 2775.43,1616.89 2818.86,1660.32 2880.66,1660.32 2889.76,1669.42 U4.19 ; U2.2 4974,2881.42 4975,2880.42 v1(4975,2505.32)
  Bottom Layer w10: v1(2710,1505.32) 2650,1505.32 2585,1570.32 2585,2395.32 2700,2510.32 3835,2510.32 3840,2505.32 v1(4975,2505.32)
GND: AE1.A2 AE1.B1 AE1.B2 AE1.B3 B1.1 BT1.N2 BT2.N2 C1.1 C2.1 C3.1 C4.1 C5.1 C6.1 C7.1 C8.1 C9.1 C10.2 C11.1 C12.1 C13.1 C14.1 C15.1 C16.1 C17.1 C18.1 C19.1 C20.1 C21.1 C22.1 C23.1 C24.1 C25.1 C26.1 C27.1 C28.1 D1.1 J2.4 J2.6 J2.8 J2.10 J2.12 J2.14 J2.16 J2.18 J2.20 J3.1 MT1.2 MT1.3 MT1.6 MT1.7 MT1.10 MT1.11 PS1.3 R3.2 R4.2 R6.2 R14.2 S1.1 S2.3 U1.2 U1.4 U2.5 U2.9 U2.10 U2.11 U2.12 U2.17 U2.21 U3.3 U4.5 U4.32 U4.42 U4.69 U5.9 U5.11 X1.2 X1.4 | length 1512.7
  Top Layer w10: U4.5 2937.01,1908.31 U4.69 U4.69@3015.75,1829.57 ; MT1.6 3000,1345.32 3008.09,1337.23 3018.09,1337.23 v1(3020,1335.32) 3019.76,1335.55 3019.76,1363.39 MT1.7 ; MT1.10 3045.85,1409.31 3064,1409.31 v1(3075,1420.32) 3073.13,1420.32 3064.52,1428.92 MT1.11 ; AE1.B2 AE1.A2 3110.79,1543.43 3118.27,1535.94 C19.1 ; U4.32 3094.49,1750.83 U4.69@3015.75,1829.57 ; v1(3205,1825) 3202.29,1825 3197.73,1829.57 U4.42 U4.69@3015.75,1829.57 ; C12.1@3289.37,1895.32 C14.1@3289.37,1970.32 ; v1(3300,1580.32) 3324.88,1580.32 X1.2 v1(3325,1550.32) ; v1(4800,2900.32) 4819.47,2919.79 4837,2919.79 U2.17 4875.47,2920.79 U2.21 4914.84,2940.47 U2.5 4973,2939.47 4989.46,2939.47 5003.09,2925.84 5003.09,2917.23 v1(5005,2915.32) ; U2.12 4839,3018.21 4856.6,3018.21 4875.47,2999.34 U2.11 ; U2.10 4934.53,2999.34 4953.4,3018.21 4971,3018.21 U2.9
  Bottom Layer w10: v1(4615,675.32) 4615.31,675.63 4615.31,735 C6.1 ; v1(4615,1145.32) 4615.31,1145 4615.31,1095.63 C5.1
  Bottom Layer w20: C2.1 C1.1
  other v1: 1600,80 1640,80 1960,80 2000,80 2880,80 2960,80 3040,80 3120,80 3200,80 3280,80 3600,80 3680,80 3760,80 3840,80 3920,80 4640,80 4680,80 4720,80 4760,80 4800,80 4840,80 4880,80 5120,80 5160,80 5200,80 1620,120 1660,120 1980,120 2020,120 4660,120 4700,120 4740,120 5220,120 1600,160 1640,160 1960,160 2000,160 2920,160 3000,160 3080,160 3160,160 3240,160 3640,160 3720,160 3800,160 3880,160 3960,160 1620,200 1660,200 1980,200 2020,200 4940,200 5140,200 5180,200 1600,240 1640,240 1960,240 2000,240 2880,240 2960,240 3040,240 3120,240 3200,240 3280,240 3600,240 3680,240 3760,240 3840,240 5120,240 5160,240 5200,240 1620,280 1660,280 1980,280 2020,280 4720,300.31 1600,320 1640,320 1960,320 2000,320 2920,320 3000,320 3080,320 3160,320 3240,320 3640,320 3720,320 3800,320 3960,320 4640,320 4680,320 4920,320 5170,345.31 5205,345.31 4670,355.31 1620,360 1660,360 1700,360 1740,360 1780,360 1820,360 1860,360 1900,360 1940,360 1980,360 2020,360 4980,360 5020,360 5060,360 5100,360 5140,360 2880,400 2960,400 3040,400 3120,400 3200,400 3280,400 3360,400 3440,400 3520,400 3600,400 3680,400 3920,400 4720,410.31 3800,480 3880,480 3960,480 2880,560 2960,560 3040,560 3120,560 3200,560 3280,560 3360,560 3440,560 3520,560 3600,560 3680,560 3760,560 3840,560 3920,560 2920,640 3000,640 3240,640 3320,640 3400,640 3480,640 3560,640 3640,640 3720,640 3960,640 2880,720 2960,720 3040,720 3200,720 3280,720 3360,720 3440,720 3520,720 3600,720 3680,720 3760,720 3840,720 3920,720 5015,785.32 2920,800 3000,800 3080,800 3160,800 3240,800 3320,800 3400,800 3480,800 3560,800 3640,800 3720,800 3800,800 3880,800 3960,800 4685,870.32 4610,910.32 5015,920.32 4685,950.32 5015,1045.32 3130,1160.32 3170,1220.32 2900,1245.32 2860,1295.32 3170,1295.32 2860,1330.32 3130,1350.32 3175,1350.32 3220,1350.32 3275,1350.32 3325,1350.32 2860,1390.32 2890,1390.32 2920,1390.32 2790,1415.32 3375,1430.32 3090,1470.32 3070,1490.32 3260,1520.32 2950,1535.32 4620,1560.32 2950,1565.32 3110,1580.32 3140,1580.32 3410,1580.32 3450,1580.32 3410,1640.32 3450,1640.32 4620,1720.32 2655,1725.32 2680,1725.32 2710,1725.32 2740,1725.32 3355,1755.32 3415,1755.32 3355,1800.32 3415,1805.32 3450,1860.32 2615,1890.32 2800,1890.32 2800,1915 3415,1920.32 3330,1925.32 2670,1930.32 2745,1930.32 2800,1940 3330,1970.32 4755,2625.32 4795,2675.32 4745,2780.32 4785,2780.32 5020,2840.32 5065,2840.32 5105,2840.32 5150,2840.32 4815,2855.32 4840,3060.32 4970,3060.32 4875,3080.32 4905,3080.32 4935,3080.32
  other v2: 750,790 200,1167.5 5525,1490 5525,2140 200,2267.5 750,2940
  other v4: 975,940 975,3190
  other v5: 5425,390 5425,3190
MISO: R12.1 R17.1 U3.4 U4.21 | length 8228.9
  Top Layer w8: R17.1 181.5,1530 v1(230,1530) ; v1(2785,1575.32) v1(2785,1480.32) 2831.5,1433.82 R12.1 ; v1(2917.58,1647.74) 2917.58,1650.98 2921.26,1654.67 U4.21 ; v1(4755,2525.32) 4797.01,2525.32 U3.4
  Bottom Layer w8: v1(2785,1480.32) 2640,1480.32 2590.32,1530 v1(230,1530) 230,1958.66 796.65,2525.32 v1(4755,2525.32) ; v1(2785,1575.32) 2857.42,1647.74 v1(2917.58,1647.74)
MOSI: MT1.14 R11.2 U2.20 U5.16 | length 8686.8
  Top Layer w8: v1(125,1835) 165,1835 175,1825 175,1795.67 U5.16 ; R11.2 2903.5,1541.82 2980.32,1465 MT1.14 ; U2.20 4875.24,2863.58 4875.24,2813.33 4877.7,2810.86 4877.7,2802.61 v1(4880,2800.32)
  Bottom Layer w8: v1(2980,1465.32) 2976.75,1465.32 2971.75,1460.32 1484.21,1460.32 1428.05,1516.48 311.48,1516.48 285,1490 155,1490 125,1520 v1(125,1835) 125,1872.05 803.27,2550.32 4410,2550.32 4660,2800.32 v1(4880,2800.32)
NetAE1_A1: AE1.A1 B1.2
NetAE1_A3: AE1.A3 U4.31
NetBT1_N1: BT1.N1 BT1.P2 BT2.N1 BT2.P2 | length 2369.2
  Bottom Layer w50: BT1.P2 BT1.N1 3428.43,3283.74 BT2.P2 BT2.N1
NetC21_2: C21.2 U4.44 | length 181.4
  Top Layer w10: U4.44 3189.6,1861.06 3190.35,1860.32 C21.2
NetC23_2: C23.2 L1.1 U4.41 | length 221.9
  Top Layer w10: U4.41 3175.89,1813.82 3185,1804.71 3185,1740 3191.5,1733.5 3222.32,1733.5 3234.87,1720.94 C23.2
NetC28_2: C28.2 U5.10 | length 65.1
  Top Layer w10: U5.10@260.2,1735.16 260.59,1734.76 324.61,1734.76 C28.2@325,1734.37
NetD1_2: D1.2 R15.2 R16.2 | length 216.2
  Top Layer w10: R16.2 4858.69,1964 R15.2 4917.47,2022.79 4938.69,2022.79 4941.16,2020.32 4971.5,2020.32 D1.2
NetJ1_1: J1.1 U2.7 U2.8 | length 347
  Top Layer w15: J1.1 5000.5,3224.82 5000.5,3008.03 4993.18,3000.71 4973.19,3000.71 U2.8 U2.7
NetJ1_2: J1.2 U2.13 U2.14 | length 371.4
  Top Layer w15: U2.14 U2.13 4836.81,3000.71 4816.82,3000.71 4770,3047.53 4770,3205.32 J1.2
NetL1_2: L1.2 U4.43 | length 122.6
  Top Layer w10: U4.43 3224.14,1845.32 3230,1839.46 L1.2@3230,1794.82
NetMT1_1: MT1.1 R12.2 | length 56.3
  Top Layer w8: R12.2 2899.9,1428.92 MT1.1
NetMT1_4: MT1.4 U4.16 | length 656.9
  Top Layer w10: v1(2740,1505.32) 2740,1385.32 2755.37,1369.94 MT1.4 MT1.4 ; v1(2810,1740.32) 2812.71,1740.32 2817.94,1735.08 U4.16
  Bottom Layer w10: v1(2740,1505.32) 2740,1695.32 2785,1740.32 v1(2810,1740.32)
NetMT1_9: MT1.9 U4.17 | length 758.1
  Top Layer w10: v1(2765,1390.32) v1(2765,1505.32) ; v1(2790,1710.32) 2792.71,1710.32 2801.72,1719.33 U4.17 ; MT1.9 3045.85,1389.63 3074.31,1389.63 v1(3075,1390.32)
  Bottom Layer w10: v1(2765,1390.32) 2800,1355.32 3040,1355.32 v1(3075,1390.32) ; v1(2765,1505.32) 2765,1685.32 v1(2790,1710.32)
NetPS1_2: PS1.2 R1.2 R4.1 | length 183.2
  Bottom Layer w10: PS1.2 4931.61,243.7 4955,220.31 4988.5,220.31 R4.1 R1.2
NetPS1_7: PS1.7 R3.1 | length 79.5
  Bottom Layer w10: R3.1@4793.5,365.31 4803.5,355.31 PS1.7
NetPS1_8: PS1.8 R2.2 | length 249
  Bottom Layer w10: R2.2 4800,460.31 4843.86,416.46 PS1.8
NetPS1_9: PS1.9 R5.1 | length 81.7
  Bottom Layer w10: 4907.83,283.07 4979.26,283.07 R5.1
NetR5_2: R5.2 R6.1 | length 71.5
  Bottom Layer w10: R5.2 R6.1
NetR7_1: R7.1 U3.2 | length 87.1
  Top Layer w10: U3.2 R7.1@4835,2711.82
NetR7_2: R7.2 U2.19 | length 103.8
  Top Layer w10: R7.2@4835,2778.82 4838,2781.82 U2.19
NetR10_1: R10.1 U4.20 | length 130.2
  Top Layer w10: R10.1 2828.5,1608.82 2863.57,1643.89 2885.44,1643.89 2905.51,1663.96 U4.20
NetR11_1: R11.1 U4.22 | length 115.2
  Top Layer w8: R11.1 2901.5,1610.32 2932.03,1610.32 2937.01,1615.3 U4.22
NetR13_2: R13.2 R14.1 S2.1 | length 215.1
  Bottom Layer w10: R13.2 R14.1 4788.38,1683.82 S2.1
NetR17_2: R17.2 U5.5 | length 98.8
  Top Layer w8: U5.5 175.47,1603.03 R17.2 R17.2@180.47,1598.97
NetU4_34: U4.34 X1.3 | length 408.3
  Top Layer w10: U4.34 3125.98,1666.17 3131.84,1660.32 3249.14,1660.32 3280,1629.46 3280,1560.32 3310,1530.32 3359.14,1530.32 3365,1536.17 3365,1576.89 X1.3
NetU4_35: U4.35 X1.1 | length 222.6
  Top Layer w10: U4.35 3185.64,1719.33 3191.5,1713.47 3191.5,1685.86 3197.36,1680 3282.28,1680 3325,1637.28 X1.1
RESET: C10.1 J2.15 S1.3 U4.8 | length 2683.2
  Top Layer w10: J2.15 562.52,1417.48 1144.06,1417.48 S1.3 1306.06,1255.47 1348.9,1255.47 C10.1 1674.37,1254.37 2281.06,1861.06 U4.8
SCK: MT1.13 R10.2 U2.1 U5.1 | length 9028.1
  Top Layer w8: v1(100,1770) 103.25,1770 107.77,1774.53 U5.1@159.8,1774.53 ; v1(2825,1490.32) R10.2 ; v1(2995,1490.32) 2995,1487.07 3000,1482.07 MT1.13 ; U2.1 4934.76,2863.58 4934.76,2820.55 v1(4935,2820.32)
  Bottom Layer w8: v1(2825,1490.32) v1(2995,1490.32) 3015,1470.32 3015,1455.32 3000,1440.32 1209.68,1440.32 1170,1480 695,1480 648.52,1433.52 131.48,1433.52 100,1465 v1(100,1770) 100,1865.43 799.88,2565.32 4405,2565.32 4660,2820.32 v1(4935,2820.32)
SERVO_PWM: J3.3 U4.10 | length 2364.2
  Top Layer w10: J3.3 1003.98,593.98 1046,593.98 2287.96,1835.94 2812.34,1835.94 2818.72,1829.57 U4.10
SW: PS1.1 S2.2 | length 1367.5
  Top Layer w10: S2.2 4945,1357.36 v1(4945,260.31)
  Bottom Layer w10: PS1.1 4939.22,263.39 4942.29,260.31 v1(4945,260.31)
TCLK: J2.9 U4.56 | length 2965.4
  Top Layer w10: J2.9 550,1820 950,1820 1350,2220 v1(3065,2220) ; v1(3062.88,2033.43) 3062.99,2033.31 U4.56
  Bottom Layer w10: v1(3062.88,2033.43) 3063.94,2034.48 3063.94,2218.94 v1(3065,2220)
TDI: J2.5 U4.57 | length 2927.6
  Top Layer w10: J2.5 555,2025 975,2025 1220,2270 v1(3035,2270) ; v1(3035.41,2032.82) 3035.64,2032.82 3046.5,2021.96 3046.5,2021.19 3047.24,2020.45 U4.57
  Bottom Layer w10: v1(3035,2270) 3035.2,2269.8 3035.2,2033.02 v1(3035.41,2032.82)
TDO: J2.13 U4.63 | length 2903.3
  Top Layer w10: J2.13 555,1625 825,1625 1341.89,2141.89 2921.89,2141.89 v1(2965,2185) ; U4.63 2952.76,2021.21 2964.36,2032.82 v1(2965,2032.82)
  Bottom Layer w10: v1(2965,2032.82) v1(2965,2185)
TMS: J2.7 U4.54 | length 3006.3
  Top Layer w10: J2.7 555,1925 960,1925 1280,2245 v1(3100,2245) ; U4.54 3094.49,2018.36 3095.24,2019.11 3095.24,2021.96 3104.18,2030.9 3108.09,2030.9 v1(3110,2032.82)
  Bottom Layer w10: v1(3100,2245) 3100,2242.29 3110,2232.29 v1(3110,2032.82)
TRST: J2.3 U4.64 | length 2807.1
  Top Layer w10: J2.3 547.48,2117.48 987.48,2117.48 1160,2290 v1(2930,2290) ; v1(2930.66,2032.15) 2930.66,2029.45 2937.01,2023.1 U4.64
  Bottom Layer w10: v1(2930,2290) 2930.33,2289.67 2930.33,2032.49 v1(2930.66,2032.15)
VBAT: BT1.P1 BT2.P1 C1.2 C2.2 PS1.6 R13.1 | length 4507.8
  Bottom Layer w10: R13.1 4607,1827.32 4570,1790.32 4570,1340.32 4770,1140.32 4770,909.17 4701.14,840.32 4620,840.32 4540,760.32 4540,665.31 4826.3,379.02 4826.3,268.46 4811.5,253.66 4793.78,253.66 PS1.6
  Bottom Layer w35: BT2.P1@4250.59,253.54 PS1.6
  Bottom Layer w40: BT2.P1 BT2.P1@4250.59,253.54
  Bottom Layer w50: BT1.P1 2566.18,206.38 2666.18,306.38 2685.67,306.38 2849.61,470.31 3745,470.31 4005,210.31 4157.36,210.31 BT2.P1
pads on no net: BT1. BT2. J2.11 J2.17 J2.19 PS1.5 S1.2 S1.4 S2.4 S2.5 S2.6 U2.3 U2.4 U2.18 U3.1 U4.2 U4.3 U4.4 U4.6 U4.7 U4.9 U4.12 U4.15 U4.23 U4.24 U4.25 U4.26 U4.27 U4.28 U4.29 U4.36 U4.37 U4.38 U4.39 U4.40 U4.46 U4.47 U4.48 U4.49 U4.50 U4.51 U4.52 U4.53 U4.58 U4.59 U4.60 U4.61 U4.62 U4.65 U4.66 U4.67 U5.3 U5.6 U5.7 U5.8 U5.12 U5.14 U5.15

## Polygon pours and split planes (outlines as drawn)
GND on Bottom Layer "NONET_L02_P002" (solid, remove dead copper, shelved, pour order 2): 40,635 cw(c40,675) 0,675 0,2760 cw(c40,2760) 40,2800 150,2800 ccw(c150,3400) 750,3400 cw(c790,3400) 790,3440 5615,3440 cw(c5615,3400) 5655,3400 5655,40 cw(c5615,40) 5615,0 790,0 cw(c790,40) 750,40 ccw(c155,40) 155,635
GND on Top Layer "NONET_L01_P003" (solid, remove dead copper, shelved, pour order 3): 40,635 cw(c40,675) 0,675 0,2760 cw(c40,2760) 40,2800 150,2800 ccw(c150,3400) 750,3400 cw(c790,3400) 790,3440 5615,3440 cw(c5615,3400) 5655,3400 5655,40 cw(c5615,40) 5615,0 790,0 cw(c790,40) 750,40 ccw(c155,40) 155,635

## Silkscreen, mask and mechanical layers (free items; w line width, h text height)
Top Overlay:
  drawing of 9 lines, arcs and shapes, not listed
  text "-" at 5035,3250.32 h50
  text "+" at 4710,3246.98 h50
  text "Motor" at 5165,3145 h60 r90
  text "MARIO" at 881,2946.32 h80
  text "KAR" at 876,2821.32 h80
  text "Team A6" at 860,2680.32 h50
  text "18-500" at 860,2580.32 h50
  text "ON" at 5240,1800.32 h50 r90
  text "RESET" at 1010,1380 h50
  text "OFF" at 5245,1165.32 h50 r90
  text "-" at 1214.44,671.3 h31.5 r90
  text "+" at 1086.3,666.05 h31.5
  text "PWM" at 1013.7,661.3 h31.5 r90
  text "Servo" at 1355,195 h60 r90
Mechanical 1:
  the board outline again, w10

## Text inside footprints (layer, text, board x,y; h text height)
D1: Top Overlay "+" at 5036.81,1998.31 h24 r90; Mechanical 13 "+" at 5036.81,1998.31 h24 r90
U1: Mechanical 13 "*" at 4725,720.32 h50 r270; Bottom Overlay "*" at 4725,720.32 h50 r270
U2: Top Overlay "*" at 4950,2830.32 h50 r180; Mechanical 13 "*" at 4947.03,2904.82 h50 r180
U4: Top Overlay "*" at 2785,1950.32 h50; Mechanical 13 "*" at 2851,1954.17 h50
U5: Top Overlay "*" at 85,1775 h50; Mechanical 13 "*" at 161.3,1759.37 h50